# Altium PCB LM2587.PcbDoc
Units mm, origin at the board's own origin, x right, y up, seen from the top; angles counter-clockwise.
Board outline 53.5 x 30.5 mm, 2 copper layers (Top Layer, Bottom Layer), stack 4 mm thick; 10 components, 8 nets, 30 pads, 0 vias.
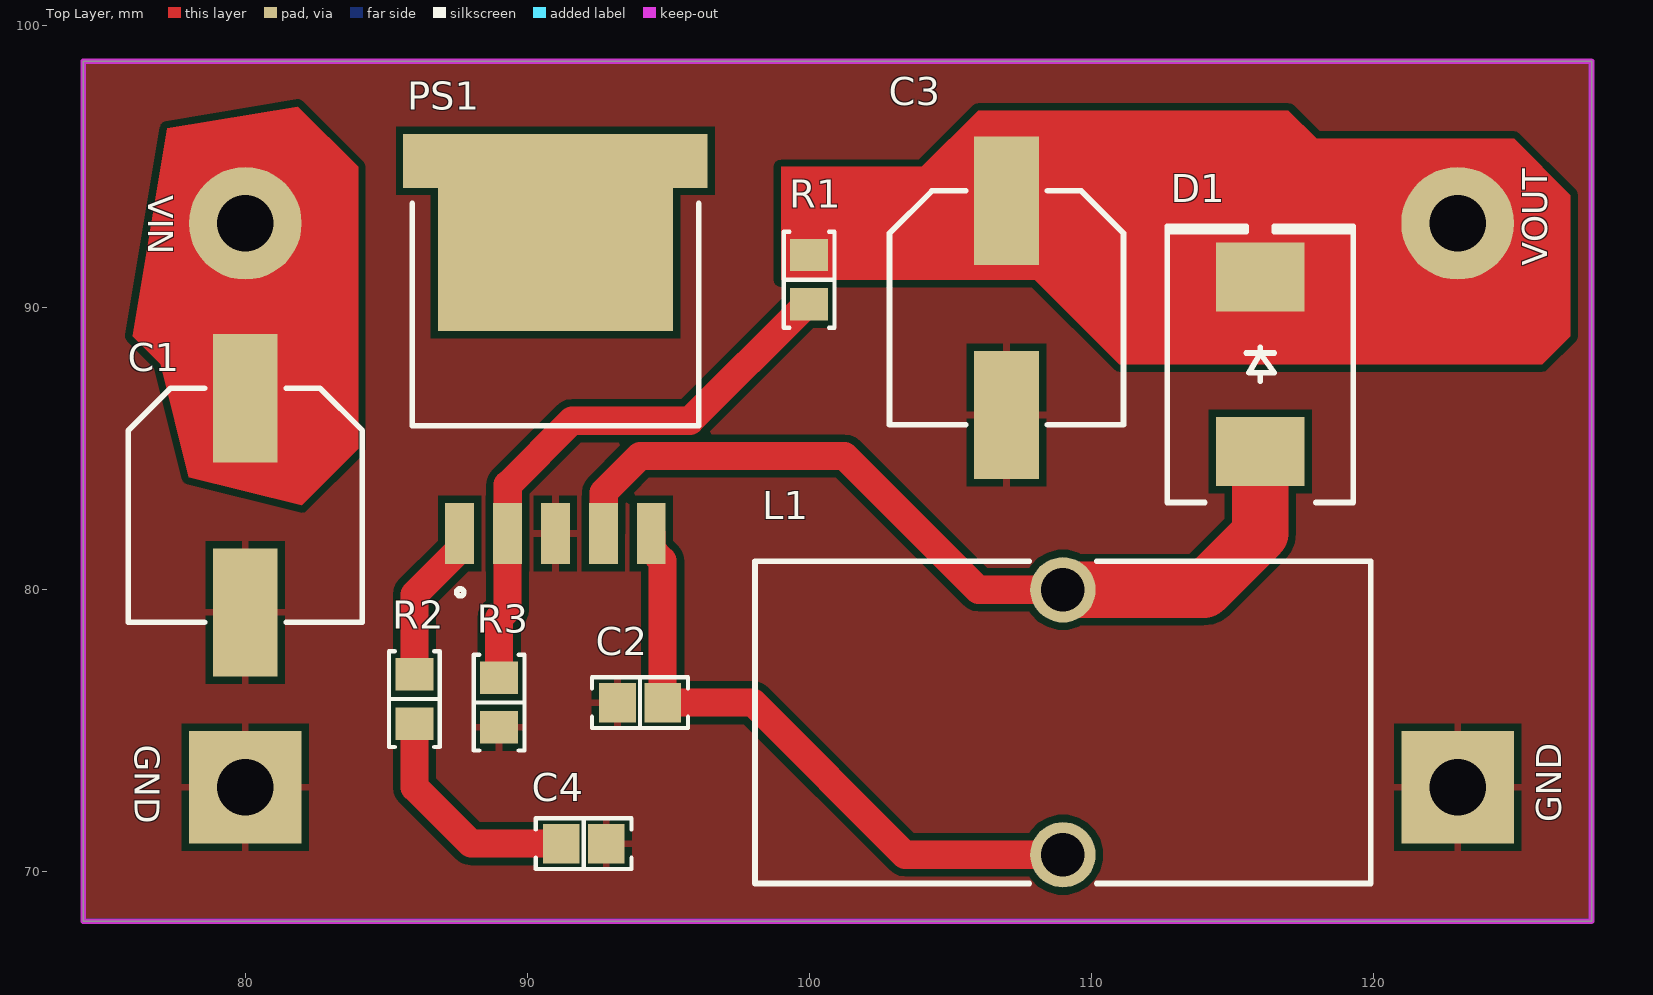
[diagram p0: Top Layer view]
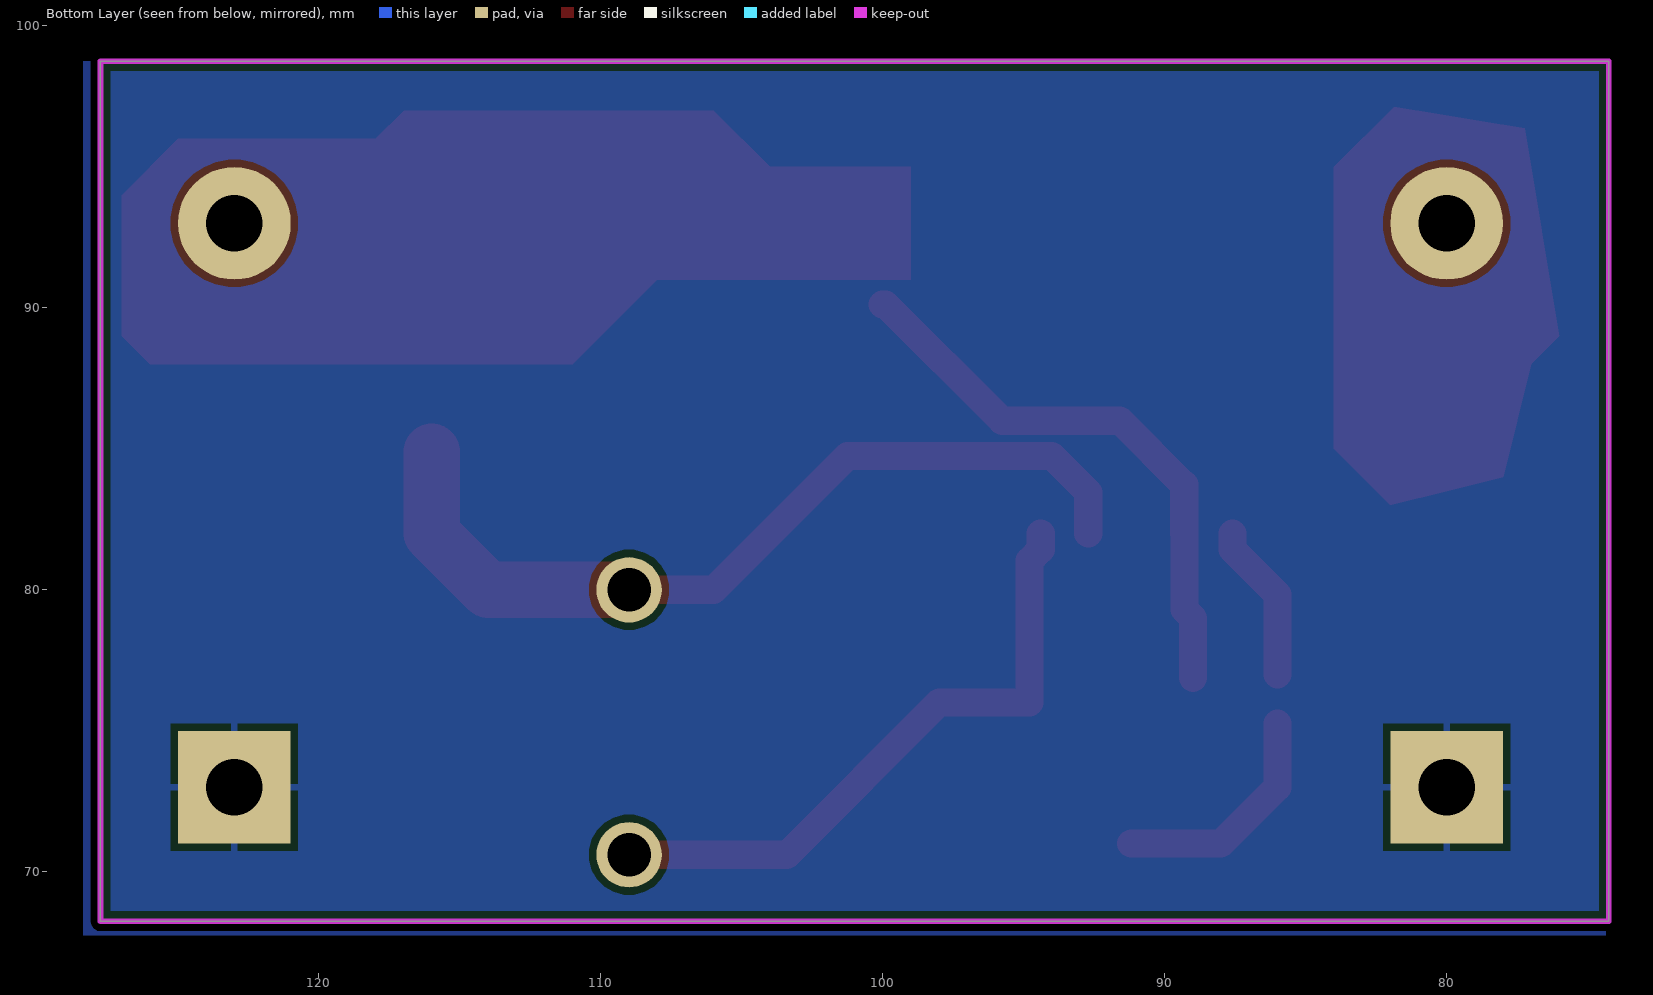
[diagram p1: Bottom Layer view, seen from below]
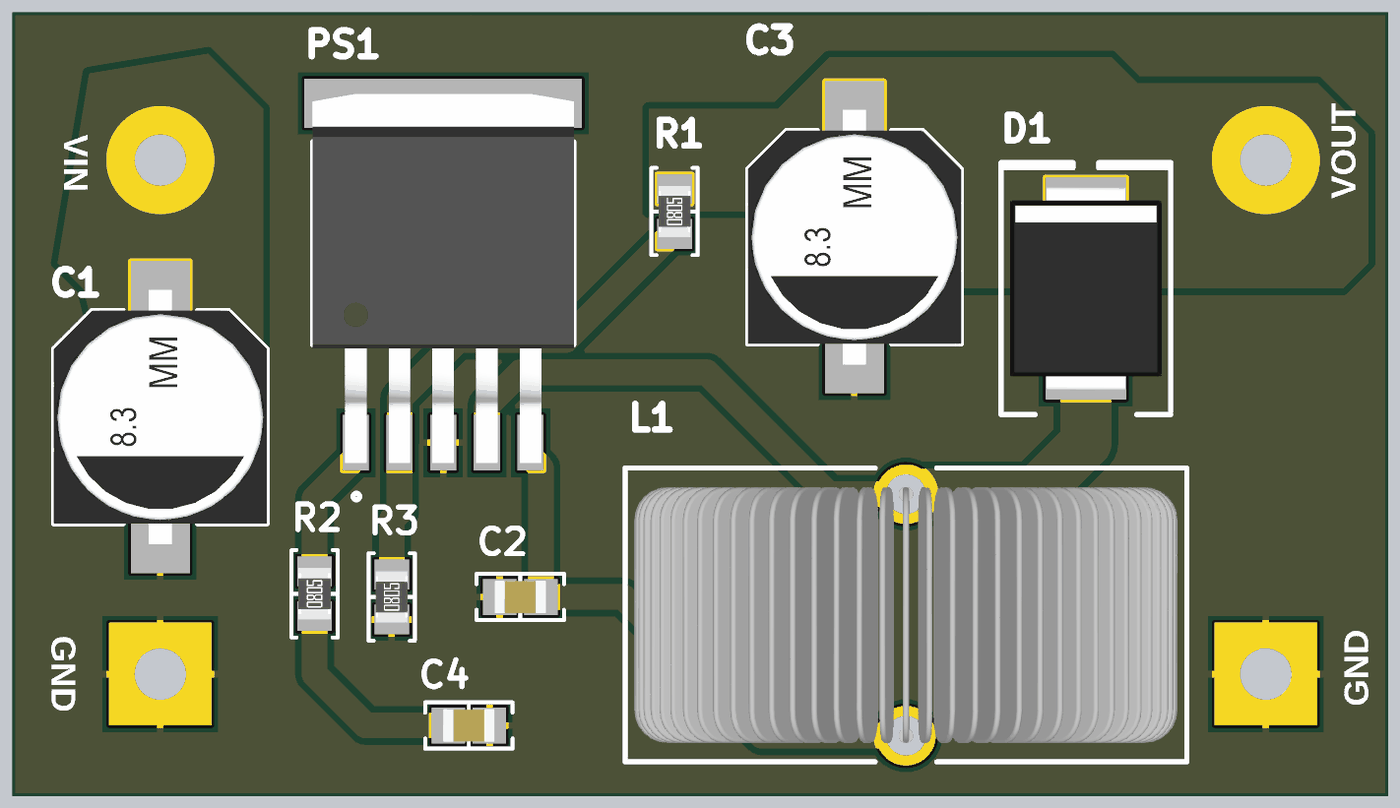
[diagram p2: 3D render of the assembled board from above, using the file's embedded part models]

## Layer stack, top to bottom
Top Solder: solder mask 0.0102, Solder Resist, Dk 3.5
Top Layer: signal copper 1
Dielectric 1: dielectric 2, FR-4, Dk 4.8
Bottom Layer: signal copper 1
Bottom Solder: solder mask 0.0102, Solder Resist, Dk 3.5

## Board outline
74.25,68.25 74.25,98.75 127.75,98.75 127.75,68.25

## Design rules (kind name [scope] priority, off if disabled: settings)
Clearance [All] p1: gap=0.254 ignorepadtopadclearanceinfootprint=FALSE except(0: Arc-Hole Track-Hole SMDPad-Hole THPad-Hole Via-Hole Fill-Hole Poly-Hole Region-Hole Text-Hole)
PolygonConnect [All] p1: connectstyle=Relief reliefconductorwidth=0.254 reliefentries=4 polygonreliefangle="90 Angle" airgapwidth=0.254
RoutingVias [All] p1: holewidth=0.711 width=1.27 viastyle="Through Hole" minholewidth=0.711 minwidth=1.27 maxholewidth=0.711 maxwidth=1.27
SolderMaskExpansion [All] p1: expansion=0.102 istentingtop=FALSE
Width [All] p1: maxlimit=2 minlimit=0.254 preferedwidth=1
30 further rules are at their usual default settings.

## Components (designator, comment, footprint, x,y, rotation, side; value= is the part's Value field where it differs from the comment)
C1 "56uF" "CAP ALSMD 8.3MM H10.5MM" 80,83 r270 top value="1200 µF"
C2 "0.1 µF" "CAP 0805_2012" 94,76 r0 top
C3 "1200 µF" "CAP ALSMD 8.3MM H10.5MM" 107,90 r270 top
C4 "0.68 µF" "CAP 0805_2012" 92,71 r180 top
D1 "SURS8360T3G" "DO214AB SMC" 116,88 r90 top
L1 "100uH" 2100LL1R0VRC 109,70.602 r90 top
PS1 "LM2587S-12_NOPB" KTT0005B 91,94.461 r270 top
R1 "56 kOhms" "RES 0805_2012" 100,91 r90 top
R2 "3 kOhms" "RES 0805_2012" 86,76.125 r90 top
R3 "2 kOhms" "RES 0805_2012" 89,76 r90 top

## Footprints (in the part's own frame and the unit in brackets; to place one, negate y for a bottom-side part, rotate by r counter-clockwise, add the part's x,y. Pads: shape width x height; smd on the part's side, far side on the other; paste and mask are expansions set on the pad)
2100LL1R0VRC [mil]
  round 91.3 hole 60.87: 1(0,0) 2(370,0)
  silkscreen extent -40,-430 410,430, body extent -11,-416 381,416, height 826
"CAP 0805_2012" [mm] "Chip Capacitor, 2-Leads, Body 2.00x1.20mm, IPC Medium Density"
  rect 1.3x1.4 smd: 1(-0.8,0) 2(0.8,0)
  silkscreen extent -1.7,-0.9 1.7,0.9, body extent -1,-0.64 1,0.64, height 1.26
"CAP ALSMD 8.3MM H10.5MM" [mm] "Aluminum Electrolytic Capacitor, Body 8.30x8.30x10.50mm, IPC Low Density"
  rect 4.55x2.3 smd: 1(-3.8,0) 2(3.8,0)
  silkscreen extent -4.15,-4.15 4.15,4.15, body extent -4.95,-4.15 4.95,4.15, height 10.5
"DO214AB SMC" [mm] "Molded Diode, 2-Leads, Body 6.85x5.90mm, IPC Medium Density"
  rect 2.45x3.15 smd: 1(-3.1,0) 2(3.1,0)
  silkscreen extent -4.9,-3.3 4.9,3.3, body extent -3.97,-2.95 3.97,2.95, height 2.6
KTT0005B [mm]
  rect 2.16x1.02 smd: 1(12.461,-3.4) 2(12.461,-1.7) 3(12.461,0) 4(12.461,1.7) 5(12.461,3.4)
  rect 6.99x8.33 smd: 6(1.786,0)
  rect 1.91x1.235 smd: 7(-0.754,4.782) 8(-0.754,-4.782)
  silkscreen extent 0.76,-5.08 14.68,5.08, body extent -1.11,-5.08 13.24,5.08, height 4.72
"RES 0805_2012" [mm] "Chip Resistor, 2-Leads, Body 2.00x1.25mm, IPC Medium Density"
  rect 1.15x1.35 smd: 1(-0.875,0) 2(0.875,0)
  silkscreen extent -1.7,-0.9 1.7,0.9, body extent -1,-0.62 1,0.63, height 0.6

## Part data
C1: library part 6.3TPV1200M8X10.5, "CAP ALUM 1200UF 20% 6.3V SMD", Capacitance="1200 µF", ESR (Equivalent Series Resistance)="80mOhm @ 100kHz", Lifetime @ Temp.="2000 Hrs @ 105°C", manufacturer=Rubycon, Operating Temperature="-55°C ~ 105°C", Ratings=AEC-Q200, Ripple Current @ High Frequency="850 mA @ 100 kHz", Ripple Current @ Low Frequency="510 mA @ 120 Hz", Supplier Part Number 1=1189-6.3TPV1200M8X10.5-ND, Tolerance=±20%, Voltage - Rated="6.3 V", Applications=Automotive, componentlink1description=Datasheet, componentlink1url=https://www.rubycon.co.jp/wp-content/uploads/catalog-aluminum/TPV.pdf, componentlink2description="DigiKey Link", componentlink2url=https://www.digikey.com/en/products/detail/rubycon/6-3TPV1200M8X10-5/15667730, Height - Seated (Max)="0.413\" (10.50mm)", lastupdated="3.02.2024 21:45:22", Lifecycle Status=Active, Minimum Order=1, Mounting Type="Surface Mount", packaging=Bulk, Part Number=6.3TPV1200M8X10.5, Part Status=Active, partid=27638, Polarization=Polar, price=0.35, series=TPV, Size / Dimension="0.315\" Dia (8.00mm)", Supplier 1=DigiKey, Surface Mount Land Size="0.327\" L x 0.327\" W (8.30mm x 8.30mm)"
C2: library part CC0805MRX7R9BB104, "CAP CER 0.1UF 50V X7R 0805", Device Package="0805 (2012 Metric)", manufacturer=Yageo, Operating Temperature="-55°C ~ 125°C", Supplier Part Number 1=311-4351-1-ND, Temperature Coefficient=X7R, Tolerance=±20%, Voltage - Rated=50V, Applications="General Purpose", Capacitance="0.1 µF", componentlink1description=Datasheet, componentlink1url=https://www.yageo.com/upload/media/product/productsearch/datasheet/mlcc/UPY-GPHC_X7R_6.3V-to-50V_18.pdf, componentlink2description="DigiKey Link", componentlink2url=https://www.digikey.com/en/products/detail/yageo/CC0805MRX7R9BB104/5884281, lastupdated="3.02.2024 20:15:50", Lifecycle Status=Active, Minimum Order=1, Mounting Type="Surface Mount, MLCC", Package / Case="0805 (2012 Metric)", packaging=TapeAndReel, Part Number=CC0805MRX7R9BB104, Part Status=Active, partid=2475, price=0.01, series=CC, Size / Dimension="0.079\" L x 0.049\" W (2.00mm x 1.25mm)", Supplier 1=DigiKey, Thickness (Max)="0.037\" (0.95mm)"
C3: library part 6.3TPV1200M8X10.5, "CAP ALUM 1200UF 20% 6.3V SMD", ESR (Equivalent Series Resistance)="80mOhm @ 100kHz", Lifetime @ Temp.="2000 Hrs @ 105°C", manufacturer=Rubycon, Operating Temperature="-55°C ~ 105°C", Ratings=AEC-Q200, Ripple Current @ High Frequency="850 mA @ 100 kHz", Ripple Current @ Low Frequency="510 mA @ 120 Hz", Supplier Part Number 1=1189-6.3TPV1200M8X10.5-ND, Tolerance=±20%, Voltage - Rated="6.3 V", Applications=Automotive, Capacitance="1200 µF", componentlink1description=Datasheet, componentlink1url=https://www.rubycon.co.jp/wp-content/uploads/catalog-aluminum/TPV.pdf, componentlink2description="DigiKey Link", componentlink2url=https://www.digikey.com/en/products/detail/rubycon/6-3TPV1200M8X10-5/15667730, Height - Seated (Max)="0.413\" (10.50mm)", lastupdated="3.02.2024 21:45:22", Lifecycle Status=Active, Minimum Order=1, Mounting Type="Surface Mount", packaging=Bulk, Part Number=6.3TPV1200M8X10.5, Part Status=Active, partid=27638, Polarization=Polar, price=0.35, series=TPV, Size / Dimension="0.315\" Dia (8.00mm)", Supplier 1=DigiKey, Surface Mount Land Size="0.327\" L x 0.327\" W (8.30mm x 8.30mm)"
C4: library part CGA4J3X7R1H684K125AB, "CAP CER 0.68UF 50V X7R 0805", Device Package="0805 (2012 Metric)", manufacturer="TDK Corporation", Operating Temperature="-55°C ~ 125°C", Ratings=AEC-Q200, Supplier Part Number 1=445-6960-1-ND, Temperature Coefficient=X7R, Tolerance=±10%, Voltage - Rated=50V, Applications=Automotive, Capacitance="0.68 µF", componentlink1description=Datasheet, componentlink1url=https://product.tdk.com/info/en/catalog/datasheets/mlcc_automotive_general_en.pdf?ref_disty=digikey, componentlink2description="DigiKey Link", componentlink2url=https://www.digikey.com/en/products/detail/tdk-corporation/CGA4J3X7R1H684K125AB/2672853, lastupdated="3.02.2024 20:15:21", Lifecycle Status=Active, Minimum Order=1, Mounting Type="Surface Mount, MLCC", Package / Case="0805 (2012 Metric)", packaging=TapeAndReel, Part Number=CGA4J3X7R1H684K125AB, Part Status=Active, partid=13295, price=0.07, series=CGA, Size / Dimension="0.079\" L x 0.049\" W (2.00mm x 1.25mm)", Supplier 1=DigiKey, Thickness (Max)="0.057\" (1.45mm)"
D1: "DIODE GEN PURP 600V 3A SMC", Current - Average Rectified (Io)=3A, Current - Reverse Leakage @ Vr="10µA @ 600V", manufacturer="ON Semiconductor", Operating Temperature - Junction="-65°C ~ 175°C", Package / Case="DO-214AB, SMC", Supplier Device Package=SMC, Supplier Part Number 1=SURS8360T3GOSCT-ND, Voltage - DC Reverse (Vr) (Max)=600V, Voltage - Forward (Vf) (Max) @ If="1.25V @ 3A", componentlink1description=Datasheet, componentlink1url=http://www.onsemi.com/pub/Collateral/MURS320T3-D.PDF, componentlink2description="DigiKey Link", componentlink2url=http://digikey.com/product-detail/en/on-semiconductor/SURS8360T3G/SURS8360T3GOSCT-ND/9087771, Diode Type=Standard, lastupdated="3.02.2024 21:24:30", Lifecycle Status=Active, Minimum Order=1, Mounting Type="Surface Mount", packaging=TapeAndReel, Part Number=SURS8360T3G, Part Status=Active, partid=348, price=0.30, Reverse Recovery Time (trr)=75ns, series=-, Speed="Fast Recovery =< 500ns, > 200mA (Io)", Supplier 1=DigiKey
L1: library part 2100LL-1R0-V-RC, "Inductor", Manufacturer_Name=Bourns, Mouser Part Number=652-2100LL-1R0-V-RC, Datasheet Link=https://componentsearchengine.com/Datasheets/1/2100LL-1R0-V-RC.pdf, Height=21.844mm, Manufacturer_Part_Number=2100LL-1R0-V-RC, Mouser Price/Stock=https://www.mouser.com/Search/Refine.aspx?Keyword=652-2100LL-1R0-V-RC
PS1: "Power Supply", Arrow Part Number=LM2587S-12/NOPB, Manufacturer_Name="Texas Instruments", Mouser Part Number=926-LM2587S-12/NOPB, Arrow Price/Stock=https://www.arrow.com/en/products/lm2587s-12nopb/texas-instruments?region=nac, Datasheet Link=http://www.ti.com/lit/gpn/lm2587, Manufacturer_Part_Number=LM2587S-12/NOPB, Mouser Price/Stock=https://www.mouser.co.uk/ProductDetail/Texas-Instruments/LM2587S-12-NOPB?qs=X1J7HmVL2ZFFt1BOlhawsg%3D%3D
R1: library part RMCF0805FT56K0, "RES 56K OHM 1% 1/8W 0805", Device Package="0805 (2012 Metric)", manufacturer="Stackpole Electronics Inc", Operating Temperature="-55°C ~ 155°C", Power (Watts)="0.125W, 1/8W", Ratings=AEC-Q200, Supplier Device Package=0805, Supplier Part Number 1=RMCF0805FT56K0CT-ND, Temperature Coefficient=±100ppm/°C, Tolerance=±1%, componentlink1description=Datasheet, componentlink1url=https://www.seielect.com/catalog/sei-packaging.pdf, componentlink2description="DigiKey Link", componentlink2url=https://www.digikey.com/en/products/detail/stackpole-electronics-inc/RMCF0805FT56K0/1760366, Composition="Thick Film", Features="Automotive AEC-Q200", Height - Seated (Max)="0.026\" (0.65mm)", lastupdated="3.02.2024 20:59:24", Lifecycle Status=Active, Minimum Order=1, Number of Terminations=2, Package / Case="0805 (2012 Metric)", packaging=CutTape, Part Number=RMCF0805FT56K0, Part Status=Active, partid=32591, price=0.01, Resistance="56 kOhms", series=RMCF, Size / Dimension="0.079\" L x 0.049\" W (2.00mm x 1.25mm)", Supplier 1=DigiKey
R2: library part ERJ-6ENF3001V, "RES SMD 3K OHM 1% 1/8W 0805", Device Package="0805 (2012 Metric)", manufacturer="Panasonic Electronic Components", Operating Temperature="-55°C ~ 155°C", Power (Watts)="0.125W, 1/8W", Ratings=AEC-Q200, Supplier Device Package=0805, Supplier Part Number 1=P3.0KCCT-ND, Temperature Coefficient=±100ppm/°C, Tolerance=±1%, componentlink1description=Datasheet, componentlink1url=https://industrial.panasonic.com/cdbs/www-data/pdf/RDA0000/AOA0000C304.pdf, componentlink2description="DigiKey Link", componentlink2url=https://www.digikey.com/en/products/detail/panasonic-electronic-components/ERJ-6ENF3001V/366038, Composition="Thick Film", Features="Automotive AEC-Q200", Height - Seated (Max)="0.028\" (0.70mm)", lastupdated="3.02.2024 20:59:34", Lifecycle Status=Active, Minimum Order=1, Number of Terminations=2, Package / Case="0805 (2012 Metric)", packaging=TapeAndReel, Part Number=ERJ-6ENF3001V, Part Status=Active, partid=30109, price=0.01, Resistance="3 kOhms", series=ERJ-6EN, Size / Dimension="0.079\" L x 0.049\" W (2.00mm x 1.25mm)", Supplier 1=DigiKey
R3: library part RCS08052K00FKEA, "RES SMD 2K OHM 1% 1/2W 0805", Device Package="0805 (2012 Metric)", manufacturer="Vishay Dale", Operating Temperature="-55°C ~ 155°C", Power (Watts)="0.5W, 1/2W", Ratings=AEC-Q200, Supplier Device Package=0805, Supplier Part Number 1=541-2840-1-ND, Temperature Coefficient=±100ppm/°C, Tolerance=±1%, componentlink1description=Datasheet, componentlink1url=http://www.vishay.com/docs/20065/rcse3.pdf, componentlink2description="DigiKey Link", componentlink2url=https://www.digikey.com/en/products/detail/vishay-dale/RCS08052K00FKEA/5866986, Composition="Thick Film", Features="Automotive AEC-Q200, Pulse Withstanding", Height - Seated (Max)="0.020\" (0.50mm)", lastupdated="3.02.2024 20:59:44", Lifecycle Status=Active, Minimum Order=1, Number of Terminations=2, Package / Case="0805 (2012 Metric)", packaging=TapeAndReel, Part Number=RCS08052K00FKEA, Part Status=Active, partid=27786, price=0.02, Resistance="2 kOhms", series="RCS e3", Size / Dimension="0.079\" L x 0.049\" W (2.00mm x 1.25mm)", Supplier 1=DigiKey

## Free pads (board coordinates)
  rect 4x4 hole 2: GND1(80,73) GND1(123,73)
  round 4 hole 2: VIN(80,93) VOUT(123,93)

## Nets (pads, with @x,y where several pads share a name; then routed paths per layer and width w, separated by ;. In a path a pad name is that pad's centre, name@x,y a point inside that pad or via, vN(x,y) a via of type N, cw(c..) or ccw(c..) an arc to the next point about the centre after c; other vN are vias at no path point)
GND: C1.2 C2.1 C3.2 C4.1 pad.GND1 PS1.3 R3.1
NetC2_2: C2.2 L1.1 PS1.5 | length 22.6
  Top Layer w1: PS1.5 94.4,81.43 94.8,81.03 C2.2 98,76 103.398,70.602 L1.1
NetC4_2: C4.2 R2.1 | length 8.3
  Top Layer w1: R2.1 86,73 88,71 C4.2
NetD1_1: D1.1 L1.2 PS1.4 | length 31
  Top Layer w1: PS1.4 92.71,82.01 92.71,83.456 94,84.746 101.254,84.746 106,80 L1.2
  Top Layer w2: L1.2 114,80 116,82 D1.1
NetPS1_1: PS1.1 R2.2 | length 5.7
  Top Layer w1: R2.2 86,79.83 87.6,81.43 PS1.1
NetPS1_2: PS1.2 R1.1 R3.2 | length 20.3
  Top Layer w1: R3.2 89,79 89.3,79.3 PS1.2 89.31,82.01 89.31,83.724 91.586,86 95.775,86 99.9,90.125 R1.1
VIN: C1.1 pad.VIN
VOUT: C3.1 D1.2 pad.VOUT R1.2
pads on no net: PS1.6 PS1.7 PS1.8

## Polygon pours and split planes (outlines as drawn)
GND on Top Layer "GND" (solid, pour order 0): 74,99 128,99 128,68 74,68
GND on Bottom Layer "GND" (solid, pour order 4): 74.361,98.75 128.361,98.75 128.361,67.75 74.361,67.75

## Keep-outs
Keep-Out Layer:
  lines w0.2: 74.25,68.25 74.25,98.75 75,98.75 127.75,98.75 127.75,68.25 74.25,68.25

## Other copper
Top Layer:
  region net VIN: 77.229,96.371 81.857,97.143 84,95 84,85 82,83 78,84 77,88 76,89
  region net VOUT: 99,91 99,95 104,95 106,97 117,97 118,96 125,96 127,94 127,89 126,88 111,88 108,91

## Silkscreen, mask and mechanical layers (free items; w line width, h text height)
Top Overlay:
  text "VIN" at 76.25,94 h1.52 r270
  text "VOUT" at 126.482,91.5 h1.52 r90
  text "GND" at 75.768,74.5 h1.52 r270
  text "GND" at 126.982,71.75 h1.52 r90